# EAGLE board MRF24J40MA_Breakout (EAGLE 6.4)
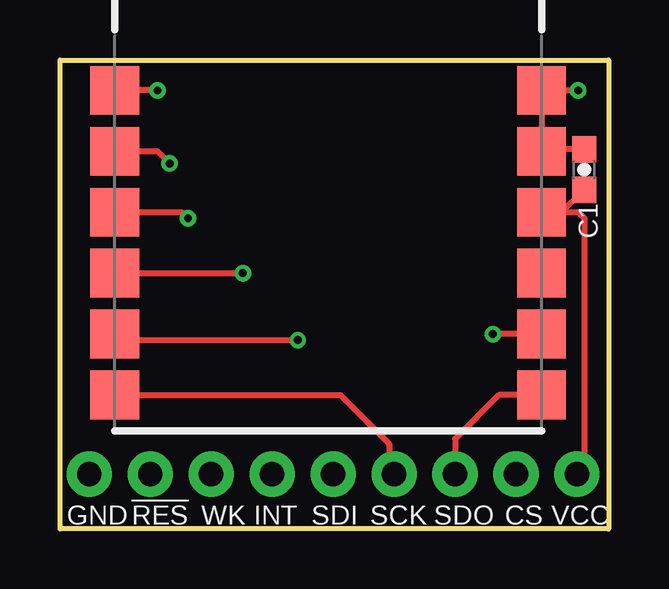
[diagram p0: board, top side]
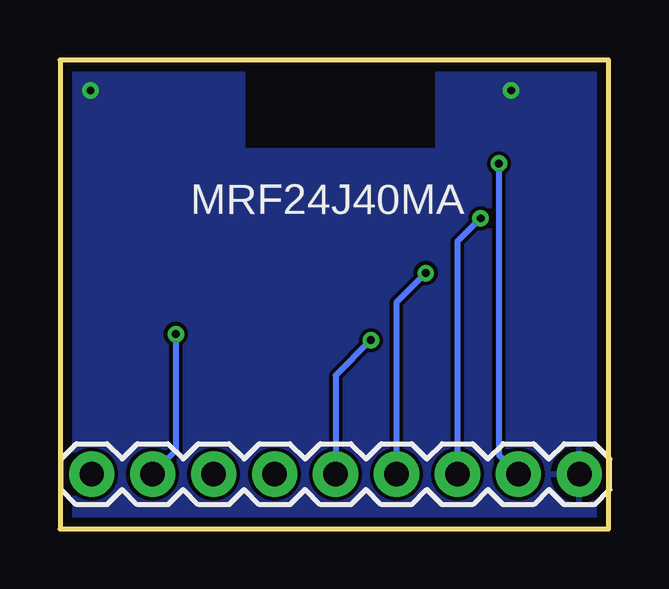
[diagram p1: board, bottom side, seen from below]

Size 22.86 x 19.56 mm. Coordinates in mm from the lower left corner, seen from the top.
Outline: 0,0 0,19.56 22.86,19.56 22.86,0 0,0
Copper layers (1*16): Top 0.0356mm / dielectric 1.5011mm / Bottom 0.0356mm
Design rules "LaenPCBOrder *": minimum track width 6mil, minimum drill 13mil, track to track 6mil, track to pad 6mil, pad to pad 6mil, via to via 6mil, smd to smd 6mil, copper to edge 15mil, drill to drill 6mil, minimum pad ring 7mil, minimum via ring 7mil, stop-mask expansion 4mil, vias tented up to drill 13mil, thermal gap 10mil

## Footprints (pad centres in the part's own frame; a part is rotated, then mirrored left to right if it is on the bottom)
0603-CAP = smd 1.1 x 1: 1 -0.85,0; 2 0.85,0
1X09 = drill 1.016 pad 1.88: 1 0,0; 2 2.54,0; 3 5.08,0; 4 7.62,0; 5 10.16,0; 6 12.7,0; 7 15.24,0; 8 17.78,0; 9 20.32,0
MRF24J40MA = smd 2.032 x 2.032: 1 0,8.89; 2 -2.54,8.89; 3 -5.08,8.89; 4 -7.62,8.89; 5 -10.16,8.89; 6 -12.7,8.89; 7 -12.7,-8.89; 8 -10.16,-8.89; 9 -7.62,-8.89; 10 -5.08,-8.89; 11 -2.54,-8.89; 12 0,-8.89

## Placement (x,y rotation side)
C1  [0603-CAP]  21.84,14.99 90 top
JP1  M09  [1X09]  1.22,2.29 180 bottom
U1  [MRF24J40MA]  11.18,18.29 90 top

## Library data of the parts
C1 = SparkFun-Passives
JP1 = SparkFun-Connectors
U1 = genericpackages

## Nets
!CS: JP1.8 U1.8
!RESET: JP1.2 U1.2
CLKOUT: U1.9
GND: C1.2 JP1.1 U1.1 U1.11 U1.12
INT: JP1.4 U1.4
SCK: JP1.6 U1.6
SDI: JP1.5 U1.5
SDO: JP1.7 U1.7
VCC: C1.1 JP1.9 U1.10
WAKE: JP1.3 U1.3

## Tracks (layer width: path | path; a pad name or v marks a point on that pad's centre or on a via)
!CS  (via drill 0.33)
  Top 0.254: U1.8 v18.03,8.13
  Bottom 0.254: v18.03,8.13 18.03,3.25 JP1.8
!RESET  (via drill 0.33)
  Top 0.254: U1.2 4.06,15.75 v4.57,15.24
  Bottom 0.254: v4.57,15.24 4.57,3.1 JP1.2
GND  (via drill 0.33)
  Top 0.254: C1.2 20.15,15.84 U1.11 U1.12 v21.59,18.29 | v4.06,18.29 U1.1
  pour Bottom: 0,0 0,19.56 7.11,19.56 7.11,15.75 15.24,15.75 15.24,19.56 22.86,19.56 22.86,0
INT  (via drill 0.33)
  Top 0.254: U1.4 v7.62,10.67
  Bottom 0.254: v7.62,10.67 8.84,9.45 JP1.4
SCK
  Top 0.254: U1.6 11.68,5.59 13.72,3.56 13.72,2.49 JP1.6
SDI  (via drill 0.33)
  Top 0.254: U1.5 2.54,7.87 v9.91,7.87
  Bottom 0.254: v9.91,7.87 11.38,6.4 JP1.5
SDO
  Top 0.254: U1.7 18.29,5.59 16.46,3.76 JP1.7
VCC
  Top 0.254: U1.10 20.92,13.21 | 20.92,13.21 C1.1 | 20.92,13.21 21.59,13.21 21.84,12.95 21.84,2.59 JP1.9
WAKE  (via drill 0.33)
  Top 0.254: U1.3 5.08,13.21 v5.33,12.95
  Bottom 0.254: v5.33,12.95 6.3,11.99 JP1.3

## Text on the board
tPlace: GND | !RES | WK | INT | SDI | SCK | SDO | CS | VCC
bPlace: MRF24J40MA